# EAGLE board hg_c1030_tinkercad (EAGLE 9.7.0)

Size 278.95 x 84.44 mm. Coordinates in mm from the lower left corner, seen from the top.
Outline: 0,0 278.95,0 278.95,84.44 0,84.44 0,0
Copper layers (1*16): Top 0.035mm / dielectric 1.5mm / Bottom 0.035mm
Design rules "default": minimum track width 6mil, minimum drill 0.35mm, track to track 6mil, track to pad 6mil, pad to pad 6mil, via to via 6mil, smd to smd 6mil, copper to edge 40mil, drill to drill 6mil, minimum pad ring 10mil, minimum via ring 8mil, stop-mask expansion 4mil, vias tented up to drill 0mil, thermal gap 10mil

## Footprints (pad centres in the part's own frame; a part is rotated, then mirrored left to right if it is on the bottom)
1X08 = drill 1.016 long: 1 -8.89,0; 2 -6.35,0; 3 -3.81,0; 4 -1.27,0; 5 1.27,0; 6 3.81,0; 7 6.35,0; 8 8.89,0
RESAD1016W63L850D250B = drill 0.83 pad 1.43: 1 -5.08,0; 2 5.08,0
ARDUINO-UNO-R3-SHIELD = drill 1.016 pad 1.88: 3.3V 24.13,-2.54; 5V 24.13,0; A0 24.13,12.7; A1 24.13,15.24; A2 24.13,17.78; A3 24.13,20.32; A4 24.13,22.86; A5 24.13,25.4; AREF -24.13,-13.97; D2 -24.13,20.32; D3 -24.13,17.78; D4 -24.13,15.24; D5 -24.13,12.7; D6 -24.13,10.16; D7 -24.13,7.62; D8 -24.13,3.81; D9 -24.13,1.27; D10 -24.13,-1.27; D11 -24.13,-3.81; D12 -24.13,-6.35; D13 -24.13,-8.89; GND@0 24.13,2.54; GND@1 24.13,5.08; GND@2 -24.13,-11.43; IOREF 24.13,-7.62; NC 24.13,-10.16; RES 24.13,-5.08; RX -24.13,25.4; SCL -24.13,-19.05; SDA -24.13,-16.51; TX -24.13,22.86; VIN 24.13,7.62

## Placement (x,y rotation side)
JP1  PINHD-1X08_1X08M  [1X08]  121.95,42.47 0 top
JP2  PINHD-1X08_1X08M  [1X08]  144.6,78.09 180 top
JP3  PINHD-1X08_1X08M  [1X08]  121.74,78.09 180 top
JP4  PINHD-1X08_1X08M  [1X08]  144.81,42.47 0 top
JPDOBOT  PINHD-1X08_1X08M  [1X08]  272.68,13.34 270 top
R1  51  [RESAD1016W63L850D250B]  123.22,9.45 270 top
R3  51  [RESAD1016W63L850D250B]  146.08,9.45 270 top
U1  ARDUINO-UNO-R3-SHIELD  [ARDUINO-UNO-R3-SHIELD]  47.88,33.25 270 top

## Library data of the parts
JP1-JP4 JPDOBOT R1 R3 U1 = Tinkercad

## Nets
JP1_1: JP1.1 JP3.8
JP1_2: JP1.2 JP3.7
JP1_3: JP1.3 JP3.6
JP1_4: JP1.4 JP3.5
JP1_5: JP1.5 JP3.4
JP1_6: JP1.6 JP3.3
JP2_3: JP2.3 JP4.6
JP4_1: JP2.8 JP4.1
JP4_2: JP2.7 JP4.2
JP4_3: JP2.6 JP4.3
JP4_4: JP2.5 JP4.4
JP4_5: JP2.4 JP4.5
U1_A0: R1.1 U1.A0
U1_A1: R3.1 U1.A1
U1_GND: JPDOBOT.8 R1.2 R3.2 U1.GND@0 U1.GND@1 U1.GND@2

## Tracks (layer width: path | path; a pad name or v marks a point on that pad's centre or on a via)
JP1_1  (1 unrouted)
JP1_2  (1 unrouted)
JP1_3  (1 unrouted)
JP1_4  (1 unrouted)
JP1_5  (1 unrouted)
JP1_6  (1 unrouted)
JP2_3  (1 unrouted)
JP4_1  (1 unrouted)
JP4_2  (1 unrouted)
JP4_3  (1 unrouted)
JP4_4  (1 unrouted)
JP4_5  (1 unrouted)
U1_A0  (1 unrouted)
U1_A1  (1 unrouted)
U1_GND  (5 unrouted)